# Altium PCB PCB0814.PcbDoc (part 1 of 2)
Units mm, origin at the board's own origin, x right, y up, seen from the top; angles counter-clockwise.
Board outline 53.24 x 23.14 mm, 2 copper layers (Top Layer, Bottom Layer); 33 components, 51 nets, 167 pads, 151 vias.
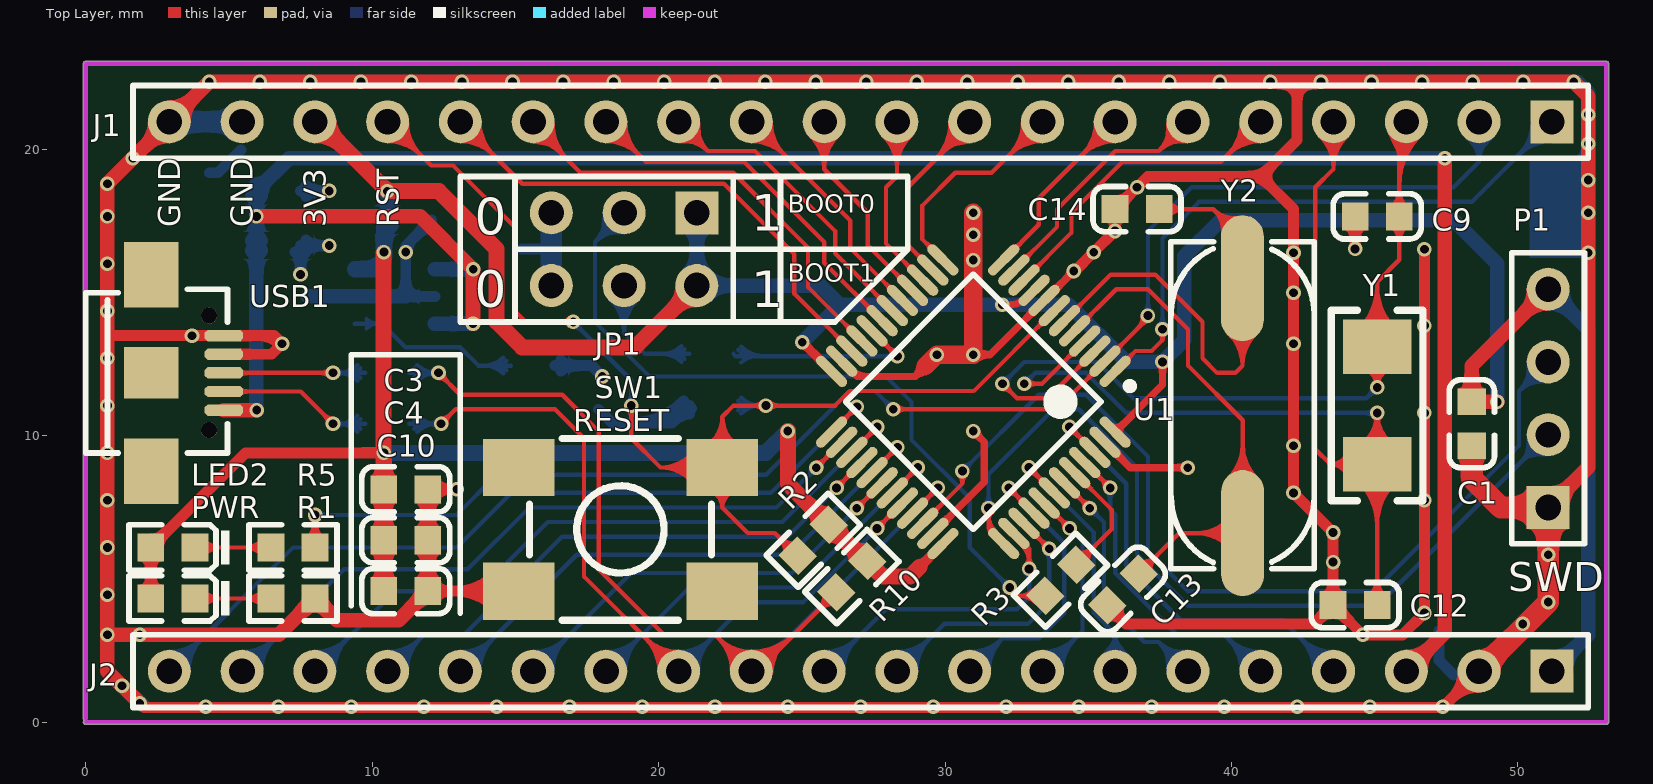
[diagram p0: Top Layer view]
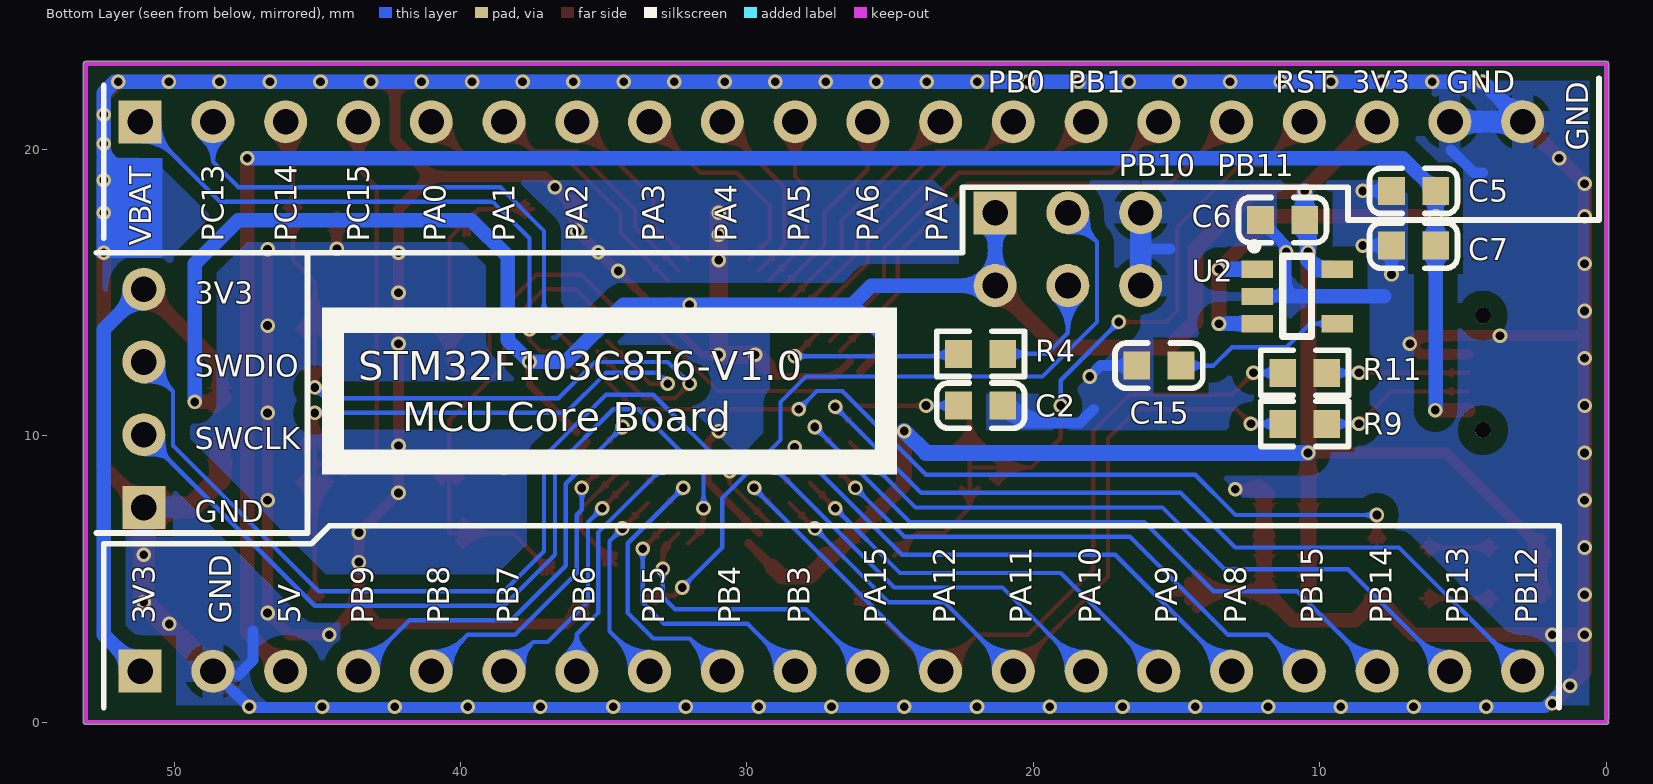
[diagram p1: Bottom Layer view, seen from below]
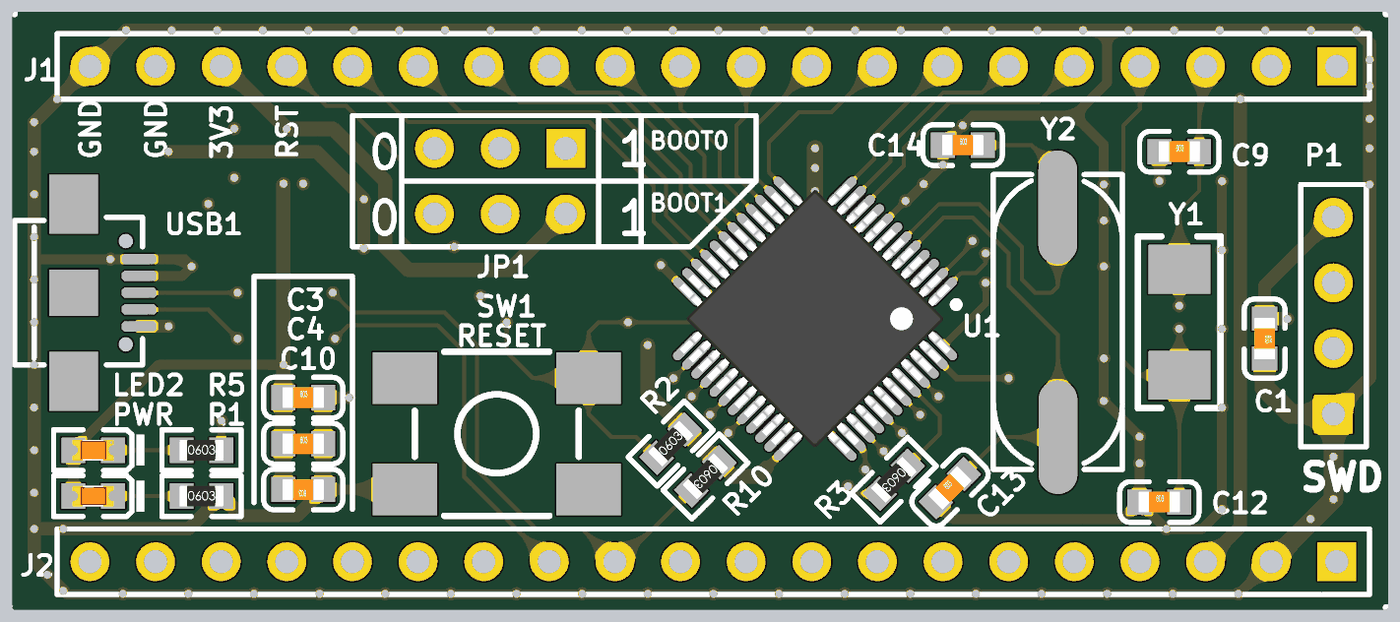
[diagram p3: 3D render of the assembled board from above, using the file's embedded part models]
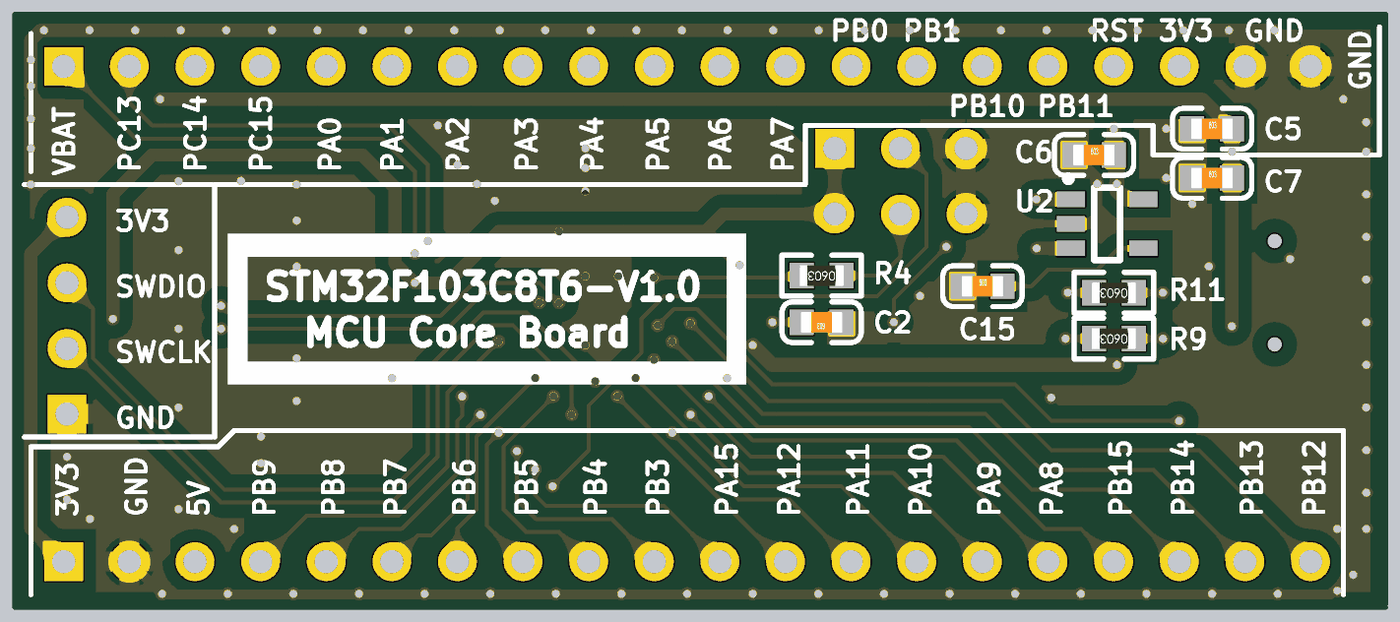
[diagram p4: 3D render of the assembled board from below, using the file's embedded part models]

## Layer stack, top to bottom
Top Solder: solder mask 0.0102, Solder Resist, Dk 3.5
Top Layer: signal copper 0.0356
Dielectric1: dielectric 0.32, FR-4, Dk 4.8
Bottom Layer: signal copper 0.0356
Bottom Solder: solder mask 0.0102, Solder Resist, Dk 3.5

## Board outline
-0.043,0.064 cw(c0,0.127) -0.077,0.127 -0.077,22.987 cw(c0,22.987) 0,23.064 53.086,23.064 cw(c53.086,22.987) 53.163,22.987 53.163,0 cw(c53.086,0) 53.086,-0.077 0,-0.077 cw(c0,0)

## Design rules (kind name [scope] priority, off if disabled: settings)
Clearance Clearance_3 [InComponent('USB1')] p1: gap=0.127 ignorepadtopadclearanceinfootprint=FALSE
Clearance Clearance_2 [InComponent(U1) and IsPad] p2: gap=0.127 ignorepadtopadclearanceinfootprint=FALSE except(0: Arc-Hole Track-Hole SMDPad-Hole THPad-Hole Via-Hole Fill-Hole Poly-Hole Region-Hole Text-Hole)
Clearance Clearance_1 [InPolygon] p3: gap=0.508 ignorepadtopadclearanceinfootprint=FALSE except(0: Arc-Hole Track-Hole SMDPad-Hole THPad-Hole Via-Hole Fill-Hole Poly-Hole Region-Hole Text-Hole)
Clearance [All] p4: gap=0.152 ignorepadtopadclearanceinfootprint=FALSE except(0: Arc-Hole Track-Hole SMDPad-Hole THPad-Hole Via-Hole Fill-Hole Poly-Hole Region-Hole Text-Hole)
PolygonConnect PolygonConnect_2 [IsSMTPin] p1: connectstyle=Direct reliefconductorwidth=0.254 reliefentries=4 polygonreliefangle="90 Angle" airgapwidth=0.254
PolygonConnect PolygonConnect_1 [isvia] p2: connectstyle=Direct reliefconductorwidth=0.254 reliefentries=4 polygonreliefangle="90 Angle" airgapwidth=0.254
PolygonConnect [All] p3: connectstyle=Relief reliefconductorwidth=0.762 reliefentries=4 polygonreliefangle="90 Angle" airgapwidth=0.254
RoutingVias [All] p1: holewidth=0.305 width=0.559 viastyle="Through Hole" minholewidth=0.305 minwidth=0.508 maxholewidth=0.305 maxwidth=0.559
SolderMaskExpansion [All] p1: expansion=0.064
Width Width_1 [InNetClass('POWER')] p1: maxlimit=1.016 minlimit=0.152 preferedwidth=0.254
Width [All] p2: maxlimit=0.152 minlimit=0.152 preferedwidth=0.152
30 further rules are at their usual default settings.

## Classes and differential pairs
component class PCB0814: C1 C2 C3 C4 C5 C6 C7 C9 C10 C12 C13 C14 C15 JP1 LED2 P1 PWR R1 R2 R3 R4 R5 R9 R10 R11 SW1 U2 USB1 Y1
net class POWER: +5 GND VCC3V3 VCC3V5

## Components (designator, comment, footprint, x,y, rotation, side; value= is the part's Value field where it differs from the comment)
C1 "104" 0603_C 48.387,10.414 r270 top locked
C2 "104" 0603_C 21.844,11.049 r0 bottom locked
C3 "104" 0603_C 11.176,8.128 r0 top locked
C4 "104" 0603_C 11.176,6.349 r0 top locked
C5 "105" 0603_C 6.731,18.542 r180 bottom locked
C6 "105" 0603_C 11.303,17.526 r180 bottom locked
C7 "104" 0603_C 6.731,16.637 r180 bottom locked
C9 "20P" 0603_C 45.085,17.653 r0 top locked
C10 "104" 0603_C 11.176,4.572 r180 top locked
C12 "20P" 0603_C 44.315,4.087 r0 top locked
C13 "20P" 0603_C 36.21,4.631 r45 top locked
C14 "20P" 0603_C 36.703,17.907 r0 top locked
C15 "223" 0603_C 15.621,12.446 r180 bottom locked
J1 "CON20" HDR1X20 51.181,20.955 r180 top locked
J2 "CON20" HDR1X20 51.181,1.778 r180 top locked
JP1 "HEADER 3X2" HDR2X3 21.336,17.78 r180 top locked
LED2 "绿灯 0603" 0603_LED_S1 3.048,6.096 r180 top locked
P1 "Header 4" HDR4X1_A 51.054,7.493 r90 top locked
PWR "红灯 0603" 0603_LED_S1 3.048,4.318 r180 top locked
R1 "680R" 0603_R 7.239,4.318 r0 top locked
R2 "10K" 0603_R 25.4,6.35 r45 top locked
R3 "100K" 0603_R 34.036,4.953 r225 top locked
R4 "100K" 0603_R 21.844,12.854 r0 bottom locked
R5 "680R" 0603_R 7.239,6.096 r0 top locked
R9 "22R" 0603_R 10.533,10.414 r0 bottom locked
R10 "10KΩ" 0603_R 26.745,5.08 r225 top locked
R11 "22R" 0603_R 10.533,12.192 r0 bottom locked
SW1 "SW-PB4" SW_PB4_A1 18.669,6.731 r180 top locked
U1 "STM32F103C8T6" LQFP-48 30.988,11.184 r225 top locked
U2 "ME6211-3.3" SOT-23-5 10.795,14.859 r0 bottom locked
USB1 "USB_Mrico" USB_MICRO 2.286,12.192 r270 top locked (schematic designator M1)
Y1 "32.768KHz" SMD-5032_2P 45.085,11.049 r90 top locked
Y2 "XTAL" X-SM49 40.386,11.049 r90 top locked

## Footprints (in the part's own frame and the unit in brackets; to place one, negate y for a bottom-side part, rotate by r counter-clockwise, add the part's x,y. Pads: shape width x height; smd on the part's side, far side on the other; paste and mask are expansions set on the pad)
0603_C [mm]
  rect 0.93x0.98 smd: 1(-0.77,0) 2(0.77,0)
  silkscreen extent -1.54,-0.79 1.54,0.79, body extent -0.8,-0.4 0.8,0.4, height 0.3
0603_LED_S1 [mm]
  rect 0.93x0.98 smd: A(0.77,0) K(-0.77,0)
  silkscreen extent -1.98,-0.79 1.54,0.79, body extent -0.8,-0.4 0.8,0.4, height 0.6
0603_R [mm]
  rect 0.93x0.98 smd: 1(-0.77,0) 2(0.77,0)
  silkscreen extent -1.53,-0.79 1.54,0.79, body extent -0.85,-0.4 0.85,0.4, height 0.56
HDR1X20 [mm] "Connector; Header; 20 Position"
  rect 1.5x1.5 hole 0.9: 1(0,0)
  round 1.5 hole 0.9: 2(2.54,0) 3(5.08,0) 4(7.62,0) 5(10.16,0) 6(12.7,0) 7(15.24,0) 8(17.78,0) 9(20.32,0) 10(22.86,0) 11(25.4,0) 12(27.94,0) 13(30.48,0) 14(33.02,0) 15(35.56,0) 16(38.1,0) 17(40.64,0) 18(43.18,0) 19(45.72,0) 20(48.26,0)
  silkscreen extent -1.27,-1.27 49.53,1.27
HDR2X3 [mm] "Connector; Header; 3x2 Position"
  rect 1.5x1.5 hole 0.9: 1(0,0)
  round 1.5 hole 0.9: 2(0,2.54) 3(2.54,0) 4(2.54,2.54) 5(5.08,0) 6(5.08,2.54)
  silkscreen extent -1.27,-1.27 6.35,3.81
HDR4X1_A [mm] "Connector; Header; 4 Position"
  rect 1.5x1.5 hole 0.9: 1(0,0)
  round 1.5 hole 0.9: 2(2.54,0) 3(5.08,0) 4(7.62,0)
  silkscreen extent -1.27,-1.27 8.89,1.27
LQFP-48 [mm] "LQFP, 48-Leads, Body 7.10x7.10mm, Pitch 0.50mm, IPC Medium Density"
  oval 1.4x0.35 smd: 1(-4.25,2.75) 2(-4.25,2.25) 3(-4.25,1.75) 4(-4.25,1.25) 5(-4.25,0.75) 6(-4.25,0.25) 7(-4.25,-0.25) 8(-4.25,-0.75) 9(-4.25,-1.25) 10(-4.25,-1.75) 11(-4.25,-2.25) 12(-4.25,-2.75) 25(4.25,-2.75) 26(4.25,-2.25) 27(4.25,-1.75) 28(4.25,-1.25) 29(4.25,-0.75) 30(4.25,-0.25) 31(4.25,0.25) 32(4.25,0.75) 33(4.25,1.25) 34(4.25,1.75) 35(4.25,2.25) 36(4.25,2.75)
  oval 0.35x1.4 smd: 13(-2.75,-4.25) 14(-2.25,-4.25) 15(-1.75,-4.25) 16(-1.25,-4.25) 17(-0.75,-4.25) 18(-0.25,-4.25) 19(0.25,-4.25) 20(0.75,-4.25) 21(1.25,-4.25) 22(1.75,-4.25) 23(2.25,-4.25) 24(2.75,-4.25) 37(2.75,4.25) 38(2.25,4.25) 39(1.75,4.25) 40(1.25,4.25) 41(0.75,4.25) 42(0.25,4.25) 43(-0.25,4.25) 44(-0.75,4.25) 45(-1.25,4.25) 46(-1.75,4.25) 47(-2.25,4.25) 48(-2.75,4.25)
  silkscreen extent -4.37,-3.15 3.15,3.6, body extent -7.42,-7.42 7.42,7.42, height 1.6
SMD-5032_2P [mm]
  rect 1.9x2.4 smd: 1(-2.05,0) 2(2.05,0)
  silkscreen extent -3.33,-1.6 3.33,1.6
SOT-23-5 [mm]
  rect 1.1x0.6 smd: 1(1.4,-0.95) 2(1.4,0) 3(1.4,0.95) 4(-1.4,0.95) 5(-1.4,-0.95)
  silkscreen extent -0.5,-1.87 1.63,1.4
SW_PB4_A1 [mm]
  rect 2.5x2 smd: 1(-3.556,2.159) 2(-3.556,-2.159) 3(3.556,-2.159) 4(3.556,2.159)
  silkscreen extent -3.17,-3.18 3.17,3.18, body extent -3.18,-3.18 3.18,3.18, height 6
USB_MICRO [mm] "USB方孔"
  oct 0.4x1.35 smd: 1(-1.3,2.54) 2(-0.65,2.54) 3(0,2.54) 4(0.65,2.54) 5(1.3,2.54)
  rect 2.286x1.9 smd: 6(3.429,0) 7(-3.429,0)
  rect 1.8x1.9 smd: 8(0,0)
  silkscreen extent -2.92,-2.29 2.79,2.67
X-SM49 [mm]
  oval 4.4x1.5 smd: 1(4.45,0.004) 2(-4.45,-0.004)
  silkscreen extent -5.7,-2.5 5.72,2.5

## Part data
C1 C2 C5 C6 C7 C10 C15: library part "0603 1uF (105) 10% 50V", "贴片电容"
C3 C4 C9 C12 C13 C14: library part "0603 68pF (680) 5% 50V", "贴片电容"
J1 J2: "Connector"
LED2: library part "0603 绿灯", "发光二极管"
P1: "接插件"
PWR: library part "0603 红灯", "发光二极管"
R1 R2 R3 R4 R5: library part "0603 1KΩ (1001) 1%", "贴片电阻"
R9 R11: library part "0603 22Ω (22R0) 1%", "贴片电阻"
R10: library part "0603 2KΩ (2001) 1%", "贴片电阻"
SW1: "微动开关"
USB1: library part USB_M, "MicroUSB接口"
Y1: library part "SMD-5032_2P 11.0592MHZ 20PF 20PPM", "贴片晶振"
Y2: "晶振"

## Free pads (board coordinates)
  round 0.56 hole 0.56 unplated: 0(4.309,10.192) 0(4.309,14.192)

## Via types
v1: diameter 0.508, hole 0.305, Top Layer to Bottom Layer, tented both sides, 151 vias

## Nets (pads, with @x,y where several pads share a name; then routed paths per layer and width w, separated by ;. In a path a pad name is that pad's centre, name@x,y a point inside that pad or via, vN(x,y) a via of type N, cw(c..) or ccw(c..) an arc to the next point about the centre after c; other vN are vias at no path point)
+5: C5.2 C7.2 J2.3 U2.1 U2.3 USB1.5 | length 87.2
  Top Layer w0.508: USB1.5@4.826,10.892 v1(5.969,10.892) ; v1(5.961,17.653) 11.684,17.653 13.523,15.814 13.523,15.809 v1(13.523,13.909) ; J2.3@46.101,1.778 47.447,3.124 v1(47.447,19.685) ; J2.3@46.101,2.274 ccw(c46.101,3.471) 46.948,2.625 ccw(c47.794,1.778) J2.3@46.597,1.778
  Bottom Layer w0.508: C7.2@5.812,16.463 cw(c5.452,16.103) 5.961,16.103 cw(c6.47,16.103) C7.2@6.11,16.463 ; C7.2@5.812,16.811 ccw(c5.452,17.171) 5.961,17.171 ccw(c6.47,17.171) C7.2@6.11,16.811 ; C5.2@5.812,18.368 cw(c5.452,18.008) 5.961,18.008 cw(c6.47,18.008) C5.2@6.11,18.368 ; C5.2@5.961,18.778 ccw(c5.961,19.348) C5.2@6.364,18.945 ; v1(5.969,10.892) 5.961,10.9 C7.2@5.961,16.637 v1(5.961,17.653) C5.2@5.961,18.542 7.104,19.685 v1(47.447,19.685) ; C5.2@6.172,18.567 cw(c6.621,18.567) C5.2@6.304,18.885 ; U2.3@12.195,13.909 v1(13.523,13.909) ; U2.1@12.195,15.809 v1(13.528,15.809)
BOOT0: R3.1 U1.44 | length 7
  Top Layer w0.152: U1.44@34.524,8.709 35.814,7.419 35.814,6.731 R3.1@34.58,5.497 ; R3.1@34.58,5.734 ccw(c34.58,6.305) 34.984,5.901 ccw(c35.388,5.497) R3.1@34.817,5.497 ; R3.1@34.58,5.886 ccw(c34.58,6.825) 35.244,6.161 ccw(c35.908,5.497) R3.1@34.969,5.497 ; U1.44@34.895,8.239 cw(c34.895,8.001) 35.063,8.169 cw(c35.232,8.338) U1.44@34.994,8.338
BOOT1: R4.2 U1.20 | length 10.8
  Top Layer w0.152: U1.20@27.452,13.659 v1(28.338,12.773) ; U1.20@27.824,13.189 cw(c27.824,12.95) 27.992,13.119 cw(c28.161,13.288) U1.20@27.923,13.288 ; v1@28.16,12.773 ccw(c27.731,12.773) 28.035,13.077 ccw(c28.338,13.38) v1@28.338,12.951
  Bottom Layer w0.152: R4.2@22.614,12.854 22.695,12.773 v1(28.338,12.773) ; R4.2@22.781,12.996 ccw(c23.32,13.535) 23.32,12.773 ; R4.2@22.889,12.554 cw(c23.418,12.025) 23.418,12.773 ; R4.2@22.889,13.104 ccw(c23.688,13.902) 23.688,12.773 ; v1@28.212,12.647 ccw(c27.909,12.344) 27.909,12.773 ccw(c27.909,13.202) v1@28.212,12.899
GND: C1.2 C2.1 C3.2 C4.2 C5.1 C6.1 C7.1 C9.1 C10.1 C12.1 C13.1 C14.1 C15.1 J1.19 J1.20 J2.2 JP1.5 JP1.6 P1.1 R1.2 SW1.4 U1.8 U1.23 U1.35 U1.47 U2.2 USB1.1 USB1.2 | length 434.5
  Top Layer w0.254: U1.23@26.392,12.598 26.925,12.065 28.956,12.065 29.32,12.429 ; U1.23@26.797,12.261 ccw(c27.27,12.734) 27.27,12.065 ; U1.35@29.574,6.588 31.369,8.383 31.369,9.779 v1(30.988,10.16) ; v1@30.988,10.033 cw(c30.988,9.726) 31.205,9.943 cw(c31.422,10.16) v1@31.115,10.16 ; v1(30.988,12.827) 31.57,12.827 U1.8@33.463,14.72 v1(34.491,15.748) ; v1@31.078,12.737 cw(c31.295,12.52) 31.295,12.827 cw(c31.295,13.134) v1@31.078,12.917 ; v1@34.364,15.748 cw(c34.058,15.748) 34.275,15.531 cw(c34.491,15.314) v1@34.491,15.621 ; U1.47@35.584,9.77 36.47,8.884 v1(38.475,8.884) ; v1@38.385,8.794 ccw(c38.168,8.577) 38.168,8.884 ccw(c38.168,9.191) v1@38.385,8.974
  Top Layer w0.381: 0.762,13.492 v1(3.713,13.492) USB1.1@4.826,13.492 6.574,13.492 v1(6.858,13.208) 6.492,12.842 USB1.2@4.826,12.842 5.73,12.842 ; v1@1.778,0.762 2.032,0.508 47.371,0.508 J2.2@48.641,1.778 ; 6.019,13.492 cw(c6.019,12.369) v1@6.813,13.163 ; C10.1@11.946,4.572 SW1.4@15.113,4.572 ; C3.2@11.946,8.128 v1(12.954,8.128) ; C10.1@12.14,4.378 cw(c12.609,3.909) 12.609,4.572 cw(c12.609,5.235) C10.1@12.14,4.766 ; C3.2@12.14,7.934 cw(c12.609,7.465) 12.609,8.128 cw(c12.609,8.791) C3.2@12.14,8.322 ; SW1.4@14.291,4 ccw(c12.909,2.618) 12.909,4.572 ccw(c12.909,6.526) SW1.4@14.291,5.144 ; SW1.4@14.56,4.269 ccw(c13.829,3.538) 13.829,4.572 ccw(c13.829,5.606) SW1.4@14.56,4.875 ; v1(34.491,15.748) 34.536,15.748 v1(35.189,16.401) v1(35.933,17.145) C14.1@35.933,17.907 37.076,19.05 41.021,19.05 ; C13.1@35.666,4.087 36.323,3.429 42.888,3.429 C12.1@43.545,4.087 ; C13.1@35.684,3.794 cw(c35.684,3.132) 36.152,3.6 cw(c36.621,4.069) C13.1@35.958,4.069 ; C14.1@35.739,17.688 cw(c35.27,17.219) 35.933,17.219 cw(c36.596,17.219) C14.1@36.127,17.688 ; C14.1@35.933,18.206 ccw(c35.933,18.93) 36.444,18.418 ; C14.1@36.208,17.932 cw(c36.81,17.932) C14.1@36.384,18.358 ; 42.291,22.352 42.291,20.32 41.021,19.05 ; 43.034,3.575 cw(c43.545,3.064) 43.545,3.787 cw(c43.545,3.064) 44.056,3.575 ; C12.1@43.094,3.636 ccw(c42.668,4.062) C12.1@43.271,4.062 ; C12.1@43.351,4.306 ccw(c42.882,4.774) 43.545,4.774 ccw(c44.208,4.774) C12.1@43.739,4.306 ; C12.1@43.82,4.062 ccw(c44.422,4.062) C12.1@43.996,3.636 ; C9.1@44.121,17.434 cw(c43.652,16.965) 44.315,16.965 cw(c44.978,16.965) C9.1@44.509,17.434 ; v1(44.315,16.518) C9.1@44.315,17.653 ; v1(46.736,16.51) v1(46.736,3.81) 45.974,3.048 v1(44.584,3.048) C12.1@43.545,4.087 ; J2.2@48.082,1.778 cw(c46.731,1.778) 47.686,0.823 cw(c48.641,-0.132) J2.2@48.641,1.219 ; 41.021,19.05 42.164,17.907 v1(42.164,16.383) v1(42.164,14.986) v1(42.164,13.208) v1(42.164,9.652) v1(42.164,8.001) v1(43.545,6.62) v1(43.545,5.588) C12.1@43.545,4.087
  Top Layer w0.508: v1(0.762,3.048) 6.739,3.048 R1.2@8.009,4.318 8.771,3.556 10.93,3.556 C10.1@11.946,4.572 C4.2@11.946,6.349 C3.2@11.946,8.128 ; v1(0.762,14.351) v1(0.762,12.7) ; v1@1.778,0.762 0.762,1.778 v1(0.762,4.445) v1(0.762,6.096) v1(0.762,7.747) v1(0.762,9.398) v1(0.762,11.049) v1(0.762,12.7) ; J1.20@2.425,20.955 cw(c1.228,20.955) 2.074,20.108 cw(c2.921,19.262) J1.20@2.921,20.459 ; J1.20@2.921,21.451 ccw(c2.921,22.648) 3.768,21.802 ccw(c4.614,20.955) J1.20@3.417,20.955 ; R1.2@7.606,3.915 cw(c8.009,3.512) 8.009,4.082 cw(c8.009,3.512) R1.2@8.412,3.915 ; R1.2@7.667,3.975 ccw(c7.349,4.293) R1.2@7.798,4.293 ; R1.2@8.22,4.293 ccw(c8.669,4.293) R1.2@8.352,3.975 ; C10.1@11.543,4.169 cw(c11.946,3.766) C10.1@11.946,4.336 ; C10.1@11.603,4.229 ccw(c11.286,4.547) C10.1@11.735,4.547 ; C10.1@11.797,4.746 ccw(c11.437,5.106) 11.946,5.106 ccw(c12.455,5.106) C10.1@12.095,4.746 ; C4.2@11.797,6.175 cw(c11.437,5.815) 11.946,5.815 cw(c12.455,5.815) C4.2@12.095,6.175 ; C4.2@11.797,6.523 ccw(c11.437,6.883) 11.946,6.883 ccw(c12.455,6.883) C4.2@12.095,6.523 ; C3.2@11.797,7.954 cw(c11.437,7.594) 11.946,7.594 cw(c12.455,7.594) C3.2@12.095,7.954 ; P1.1@51.054,7.493 52.451,8.89 v1(52.451,20.193) v1(52.451,21.209) 52.451,21.844 v1(51.943,22.352) v1(50.179,22.352) v1(48.415,22.352) v1(46.651,22.352) v1(44.887,22.352) v1(43.124,22.352) 42.291,22.352 v1(41.36,22.352) v1(39.596,22.352) v1(37.832,22.352) v1(36.068,22.352) v1(34.304,22.352) v1(32.54,22.352) v1(30.776,22.352) v1(29.012,22.352) v1(27.249,22.352) v1(25.485,22.352) v1(23.721,22.352) v1(21.957,22.352) v1(20.193,22.352) v1(18.429,22.352) v1(16.665,22.352) v1(14.901,22.352) v1(13.137,22.352) v1(11.374,22.352) v1(9.61,22.352) v1(7.846,22.352) v1(6.082,22.352) v1(4.318,22.352) J1.20@2.921,20.955 v1(0.762,18.796) v1(0.762,17.653) v1(0.762,16.002) v1(0.762,12.7) ; P1.1@51.054,7.989 ccw(c51.054,9.186) 51.901,8.34 ccw(c52.747,7.493) P1.1@51.55,7.493
  Top Layer w0.635: 29.32,12.429 v1(29.718,12.827) v1(30.988,12.827) v1(30.988,17.78)
  Top Layer w0.762: C1.2@48.387,9.644 48.387,8.509 49.403,7.493 P1.1@51.054,7.493 v1(51.054,4.191) J2.2@48.641,1.778 ; J2.2@48.641,2.147 ccw(c48.641,3.038) 49.271,2.408 ccw(c49.901,1.778) J2.2@49.01,1.778 ; P1.1@50.793,7.754 cw(c50.163,8.384) 50.163,7.493 cw(c50.163,6.602) 50.793,7.232 cw(c50.163,6.602) 51.054,6.602 cw(c51.945,6.602) P1.1@51.315,7.232
  Bottom Layer w0.381: 1.778,0.889 2.159,0.508 47.371,0.508 J2.2@48.641,1.778 ; 4.318,19.177 4.625,19.177 5.424,19.976 ; C7.1@7.307,16.418 cw(c6.838,15.949) 7.501,15.949 cw(c8.164,15.949) C7.1@7.695,16.418 ; v1(7.501,15.629) C7.1@7.501,16.637 v1(8.509,16.637) ; C5.1@7.501,18.542 v1(8.509,18.542) ; C7.1@7.695,16.443 cw(c8.164,15.974) 8.164,16.637 cw(c8.164,17.3) C7.1@7.695,16.831 ; C5.1@7.695,18.348 cw(c8.164,17.879) 8.164,18.542 cw(c8.164,19.205) C5.1@7.695,18.736 ; v1(11.176,16.409) 11.176,14.859 U2.2@12.195,14.859 ; v1@11.176,16.629 C6.1@12.073,17.526 ; v1@11.239,16.409 cw(c11.924,16.409) 11.44,16.893 ; 11.562,17.015 cw(c12.073,16.503) C6.1@12.073,17.227 ; C6.1@11.622,17.075 ccw(c11.196,17.501) C6.1@11.799,17.501 ; 15.24,16.51 16.255,16.51 16.256,16.511 ; C15.1@16.391,12.446 17.653,12.446 v1(18.034,12.065) ; C15.1@16.585,12.252 cw(c17.054,11.783) 17.054,12.446 cw(c17.054,13.109) C15.1@16.585,12.64 ; 17.907,10.922 18.383,10.446 20.471,10.446 C2.1@21.074,11.049 ; 19.016,10.446 ccw(c19.016,13.082) C2.1@20.88,11.218 ; 19.936,10.446 ccw(c19.936,12.162) C2.1@21.149,10.949 ; 20.563,10.538 cw(c21.074,10.026) C2.1@21.074,10.75 ; C2.1@20.623,10.598 ccw(c20.197,11.024) C2.1@20.8,11.024 ; 47.244,3.175 47.244,2.159 47.752,1.651
  Bottom Layer w0.508: J1.20@2.921,20.955 v1(4.318,22.352) ; J1.20@2.921,21.451 ccw(c2.921,22.648) 3.768,21.802 ccw(c4.614,20.955) J1.20@3.417,20.955 ; v1(6.082,22.352) v1(4.318,22.352) ; 7.747,14.859 11.176,14.859 ; v1(27.249,22.352) v1(29.012,22.352) ; v1(43.124,22.352) v1(41.36,22.352) ; 52.07,19.431 52.451,19.812 v1(52.451,20.193) ; 52.261,19.622 ccw(c51.784,20.098) v1(52.451,20.193) ; v1(4.318,22.352) v1(7.846,22.352) v1(9.61,22.352) v1(11.374,22.352) v1(13.137,22.352) v1(14.901,22.352) v1(16.665,22.352) v1(18.429,22.352) v1(20.193,22.352) v1(21.957,22.352) v1(23.721,22.352) v1(25.485,22.352) v1(29.012,22.352) ; v1(29.012,22.352) v1(30.776,22.352) v1(32.54,22.352) v1(34.304,22.352) v1(36.068,22.352) v1(37.832,22.352) v1(39.596,22.352) v1(41.36,22.352) ; v1(41.36,22.352) v1(44.887,22.352) v1(46.651,22.352) v1(48.415,22.352) v1(50.179,22.352) 52.07,22.352 52.451,21.971 v1(52.451,21.209) v1(52.451,20.193)
  Bottom Layer w0.762: J1.20@2.921,20.955 J1.19@5.461,20.955 ; J1.20@3.182,20.694 cw(c3.812,20.064) 3.812,20.955 cw(c3.812,21.846) J1.20@3.182,21.216 ; J1.19@5.2,20.694 ccw(c4.57,20.064) 4.57,20.955 ccw(c4.57,21.846) J1.19@5.2,21.216 ; JP1.6@16.256,15.24 16.256,16.511 JP1.5@16.256,17.78
  other v1: 4.191,0.533 6.731,0.533 9.271,0.533 11.811,0.533 14.351,0.533 16.891,0.533 19.431,0.533 21.971,0.533 24.511,0.533 27.051,0.533 29.591,0.533 32.131,0.533 34.671,0.533 37.211,0.533 39.751,0.533 42.291,0.533 44.831,0.533 47.371,0.533 1.887,0.653 1.27,1.27 1.887,3.048 50.165,3.429 51.054,5.842 46.736,7.747 46.736,10.795 46.736,13.843 30.988,16.129 52.451,16.383 30.988,17.018 52.451,17.78 36.703,18.669 52.451,18.923 1.651,19.685
NetC15_2: C15.2 U2.4 | length 9.3
  Bottom Layer w0.152: U2.4@9.395,13.909 10.348,13.909 11.176,13.081 13.081,13.081 13.716,12.446 C15.2@14.851,12.446 ; U2.4@9.803,13.751 cw(c10.185,13.369) 10.185,13.909 cw(c10.185,14.449) U2.4@9.803,14.067 ; C15.2@14.576,12.171 ccw(c13.912,11.507) 13.912,12.446 ccw(c13.912,13.385) C15.2@14.576,12.721 ; C15.2@14.684,12.279 ccw(c14.28,11.875) 14.28,12.446 ccw(c14.28,13.017) C15.2@14.684,12.613
NetJP1_3: JP1.3 R3.2 | length 35.5
  Top Layer w0.152: v1(32.258,4.699) 32.548,4.409 ; v1@32.264,4.521 cw(c32.276,4.136) 32.548,4.409 ; v1@32.436,4.693 ccw(c32.821,4.681) 32.548,4.409 ; 32.578,4.409 cw(c32.578,3.53) R3.2@33.199,4.151 ; R3.2@32.946,4.409 cw(c32.946,3.898) R3.2@33.307,4.259 ; R3.2@33.187,4.689 cw(c32.549,5.276) 32.549,4.409 ; R3.2@33.492,4.409 32.548,4.409 ; R3.2@32.895,4.409 ccw(c32.895,4.957) R3.2@33.3,4.586 ; R3.2@32.895,4.409 ccw(c32.895,4.957) R3.2@33.3,4.586 ; R3.2@32.895,4.409 ccw(c32.895,4.957) R3.2@33.3,4.586 ; R3.2@32.895,4.409 ccw(c32.895,4.957) R3.2@33.3,4.586
  Bottom Layer w0.152: JP1.3@18.125,17.718 cw(c16.935,17.609) 17.78,16.764 ; JP1.3@18.277,17.732 cw(c17.356,17.648) 18.01,16.994 cw(c18.664,16.34) JP1.3@18.748,17.261 ; JP1.3@18.429,17.746 cw(c17.777,17.686) 18.24,17.224 cw(c18.702,16.761) JP1.3@18.762,17.413 ; JP1.3@18.734,17.109 ccw(c18.625,15.919) 17.78,16.764 ; JP1.3@18.796,17.78 17.78,16.764 ; v1@32.08,4.699 ccw(c31.651,4.699) 31.954,5.003 ccw(c32.258,5.306) v1@32.258,4.877 ; v1(32.258,4.699) 30.861,6.096 30.861,7.82 28.829,9.852 28.829,11.176 27.94,12.065 19.685,12.065 17.78,13.97 17.78,16.764
NetJP1_4: JP1.4 R4.1 | length 12.5
  Bottom Layer w0.152: JP1.4@18.32,14.764 cw(c17.169,13.613) 18.796,13.613 cw(c20.423,13.613) JP1.4@19.272,14.764 ; JP1.4@18.427,14.871 cw(c17.537,13.981) 18.796,13.981 cw(c20.055,13.981) JP1.4@19.165,14.871 ; JP1.4@18.535,14.979 cw(c17.905,14.349) 18.796,14.349 cw(c19.687,14.349) JP1.4@19.057,14.979 ; JP1.4@18.796,15.24 18.796,13.589 19.531,12.854 R4.1@21.074,12.854 ; R4.1@20.799,12.579 ccw(c20.135,11.915) 20.135,12.854 ccw(c20.135,13.793) R4.1@20.799,13.129 ; R4.1@20.907,12.687 ccw(c20.503,12.283) 20.503,12.854 ccw(c20.503,13.425) R4.1@20.907,13.021
NetLED2_K: LED2.K R5.1 | length 7.4
  Top Layer w0.152: LED2.K@3.818,6.096 R5.1@6.469,6.096 ; LED2.K@3.985,5.929 cw(c4.389,5.525) 4.389,6.096 cw(c4.389,6.667) LED2.K@3.985,6.263 ; LED2.K@4.093,5.821 cw(c4.757,5.157) 4.757,6.096 cw(c4.757,7.035) LED2.K@4.093,6.371 ; R5.1@6.194,5.821 ccw(c5.53,5.157) 5.53,6.096 ccw(c5.53,7.035) R5.1@6.194,6.371 ; R5.1@6.302,5.929 ccw(c5.898,5.525) 5.898,6.096 ccw(c5.898,6.667) R5.1@6.302,6.263
NetM1_3: R11.1 USB1.3 | length 9.1
  Top Layer w0.152: USB1.3@4.826,12.192 v1(8.636,12.192) ; USB1.3@5.389,12.104 cw(c5.6,11.893) 5.6,12.192 cw(c5.6,12.491) USB1.3@5.389,12.28 ; v1@8.51,12.066 ccw(c8.207,11.763) 8.207,12.192 ccw(c8.207,12.621) v1@8.51,12.318
  Bottom Layer w0.152: v1(8.636,12.192) R11.1@9.763,12.192 ; v1@8.762,12.066 cw(c9.065,11.763) 9.065,12.192 cw(c9.065,12.621) v1@8.762,12.318 ; R11.1@9.488,11.917 ccw(c8.824,11.253) 8.824,12.192 ccw(c8.824,13.131) R11.1@9.488,12.467 ; R11.1@9.596,12.025 ccw(c9.192,11.621) 9.192,12.192 ccw(c9.192,12.763) R11.1@9.596,12.359
NetM1_4: R9.1 USB1.4 | length 9.6
  Top Layer w0.152: USB1.4@4.826,11.542 7.508,11.542 v1(8.636,10.414) ; USB1.4@5.389,11.454 cw(c5.6,11.243) 5.6,11.542 cw(c5.6,11.841) USB1.4@5.389,11.63 ; v1@8.458,10.414 ccw(c8.029,10.414) 8.332,10.718 ccw(c8.636,11.021) v1@8.636,10.592
  Bottom Layer w0.152: v1(8.636,10.414) R9.1@9.763,10.414 ; v1@8.762,10.288 cw(c9.065,9.985) 9.065,10.414 cw(c9.065,10.843) v1@8.762,10.54 ; R9.1@9.488,10.139 ccw(c8.824,9.475) 8.824,10.414 ccw(c8.824,11.353) R9.1@9.488,10.689 ; R9.1@9.596,10.247 ccw(c9.192,9.843) 9.192,10.414 ccw(c9.192,10.985) R9.1@9.596,10.581
NetPWR_K: PWR.K R1.1 | length 7.4
  Top Layer w0.152: PWR.K@3.818,4.318 R1.1@6.469,4.318 ; PWR.K@3.985,4.151 cw(c4.389,3.747) 4.389,4.318 cw(c4.389,4.889) PWR.K@3.985,4.485 ; PWR.K@4.093,4.043 cw(c4.757,3.379) 4.757,4.318 cw(c4.757,5.257) PWR.K@4.093,4.593 ; R1.1@6.194,4.043 ccw(c5.53,3.379) 5.53,4.318 ccw(c5.53,5.257) R1.1@6.194,4.593 ; R1.1@6.302,4.151 ccw(c5.898,3.747) 5.898,4.318 ccw(c5.898,4.889) R1.1@6.302,4.485
NRST: C2.2 J1.17 R2.1 SW1.2 U1.7 | length 71.4
  Top Layer w0.152: J1.17@10.541,20.281 cw(c10.541,18.655) 11.691,19.805 cw(c12.841,20.955) J1.17@11.215,20.955 ; J1.17@10.541,20.434 cw(c10.541,19.175) 11.431,20.065 cw(c12.321,20.955) J1.17@11.062,20.955 ; J1.17@10.541,20.586 cw(c10.541,19.695) 11.171,20.325 cw(c11.801,20.955) J1.17@10.91,20.955 ; J1.17@10.541,20.955 12.065,19.431 12.827,19.431 14.986,17.272 14.986,14.351 15.367,13.97 v1(17.018,13.97) ; v1@16.892,13.844 ccw(c16.589,13.541) 16.589,13.97 ccw(c16.589,14.399) v1@16.892,14.096 ; v1@18.924,10.923 cw(c18.621,10.62) 19.05,10.62 cw(c19.479,10.62) v1@19.176,10.923 ; v1(19.05,11.049) 19.05,9.906 20.066,8.89 ; SW1.2@21.251,8.317 ccw(c20.066,7.38) 20.066,8.89 ; SW1.2@21.251,9.463 cw(c20.066,10.4) 20.066,8.89 ; SW1.2@21.37,8.411 ccw(c20.381,7.629) 20.381,8.89 ccw(c20.381,10.151) SW1.2@21.37,9.369 ; SW1.2@21.49,8.506 ccw(c20.696,7.878) 20.696,8.89 ccw(c20.696,9.902) SW1.2@21.49,9.274 ; SW1.2@21.697,9.648 ccw(c20.991,10.66) 22.225,10.66 ; SW1.2@21.784,9.523 ccw(c21.195,10.368) 22.225,10.368 ccw(c23.255,10.368) SW1.2@22.666,9.523 ; SW1.2@21.863,8.04 cw(c21.631,7.493) 22.225,7.493 ; SW1.2@21.871,9.398 ccw(c21.398,10.076) 22.225,10.076 ccw(c23.052,10.076) SW1.2@22.579,9.398 ; SW1.2@21.923,8.18 cw(c21.729,7.724) 22.225,7.724 cw(c22.721,7.724) SW1.2@22.527,8.18 ; SW1.2@22.587,8.04 ccw(c22.819,7.493) 22.225,7.493 ; SW1.2@22.753,9.648 cw(c23.459,10.66) 22.225,10.66 ; v1@23.623,10.923 ccw(c23.32,10.62) 23.32,11.049 ccw(c23.32,11.478) v1@23.623,11.175 ; v1@23.875,10.923 cw(c24.178,10.62) 24.178,11.049 cw(c24.178,11.478) v1@23.875,11.175 ; R2.1@24.449,5.823 ccw(c23.51,5.823) 24.174,6.487 ccw(c24.838,7.151) R2.1@24.838,6.212 ; R2.1@24.601,5.823 ccw(c24.031,5.823) 24.434,6.227 ccw(c24.838,6.63) R2.1@24.838,6.06 ; R2.1@24.856,5.806 24.057,6.604 23.114,6.604 22.225,7.493 ; U1.7@33.346,13.995 cw(c33.108,13.995) 33.277,13.826 cw(c33.445,13.657) U1.7@33.445,13.896 ; U1.7@33.816,14.366 31.007,11.557 26.67,11.557 26.162,11.049 v1(23.749,11.049) 22.614,11.049 22.225,10.66 ; 20.066,8.89 SW1.2@22.225,8.89 ; 22.225,7.493 SW1.2@22.225,8.89 ; SW1.2@22.225,8.89 22.225,10.66
  Bottom Layer w0.152: v1@17.018,13.792 cw(c17.018,13.363) 17.322,13.666 cw(c17.625,13.97) v1@17.196,13.97 ; v1(17.018,13.97) 19.05,11.938 v1(19.05,11.049) ; v1@18.924,11.175 ccw(c18.621,11.478) 19.05,11.478 ccw(c19.479,11.478) v1@19.176,11.175 ; C2.2@22.614,11.049 v1(23.749,11.049) ; C2.2@22.781,10.882 cw(c23.185,10.478) 23.185,11.049 cw(c23.185,11.62) C2.2@22.781,11.216 ; C2.2@22.889,10.774 cw(c23.553,10.11) 23.553,11.049 cw(c23.553,11.988) C2.2@22.889,11.324 ; v1@23.623,10.923 ccw(c23.32,10.62) 23.32,11.049 ccw(c23.32,11.478) v1@23.623,11.175
OSCIN: C13.2 U1.5 Y2.2 | length 31.9
  Top Layer w0.152: U1.5@34.524,13.659 35.978,15.113 37.084,15.113 38.481,13.716 38.481,12.446 40.39,10.537 Y2.2@40.39,6.599 38.178,6.599 C13.2@36.755,5.175 ; U1.5@34.895,14.129 ccw(c34.895,14.367) 35.063,14.199 ccw(c35.232,14.03) U1.5@34.994,14.03 ; C13.2@36.755,5.412 ccw(c36.755,5.983) 37.158,5.579 ccw(c37.562,5.175) C13.2@36.991,5.175 ; C13.2@36.755,5.564 ccw(c36.755,6.503) 37.419,5.839 ccw(c38.082,5.175) C13.2@37.144,5.175 ; Y2.2@39.914,6.123 ccw(c38.764,4.972) 38.764,6.599 ccw(c38.764,8.226) Y2.2@39.914,7.075 ; Y2.2@39.914,8.525 ccw(c38.764,9.676) 40.39,9.676 ccw(c42.017,9.676) Y2.2@40.867,8.525 ; Y2.2@40.022,6.23 ccw(c39.132,5.34) 39.132,6.599 ccw(c39.132,7.858) Y2.2@40.022,6.968 ; Y2.2@40.022,8.418 ccw(c39.132,9.308) 40.39,9.308 ccw(c41.649,9.308) Y2.2@40.759,8.418 ; Y2.2@40.129,6.338 ccw(c39.499,5.708) 39.499,6.599 ccw(c39.499,7.49) Y2.2@40.129,6.86 ; Y2.2@40.129,8.31 ccw(c39.499,8.94) 40.39,8.94 ccw(c41.281,8.94) Y2.2@40.651,8.31
OSCOUT: C14.2 U1.6 Y2.1 | length 29.4
  Top Layer w0.152: U1.6@34.17,14.012 35.779,15.621 37.343,15.621 38.989,13.975 38.989,12.7 39.497,12.192 40.132,12.192 40.382,12.442 ; U1.6@34.541,14.482 ccw(c34.541,14.721) 34.71,14.552 ccw(c34.879,14.384) U1.6@34.64,14.384 ; C14.2@37.473,17.907 39.366,17.907 40.382,16.891 Y2.1@40.382,15.499 40.382,12.442 ; C14.2@37.64,17.74 cw(c38.044,17.336) 38.044,17.907 cw(c38.044,18.478) C14.2@37.64,18.074 ; C14.2@37.748,17.632 cw(c38.412,16.968) 38.412,17.907 cw(c38.412,18.846) C14.2@37.748,18.182 ; 39.599,17.674 ccw(c40.143,18.218) Y2.1@40.285,17.461 ; 39.625,17.647 cw(c39.046,17.068) Y2.1@39.862,16.995 ; Y2.1@39.711,17.009 ccw(c38.622,17.105) 39.395,17.878 ccw(c40.079,18.562) Y2.1@40.257,17.611 ; 39.803,17.469 ccw(c40.208,17.874) Y2.1@40.314,17.312 ; Y2.1@39.909,13.569 cw(c38.802,12.442) 40.382,12.442 ; Y2.1@40.016,13.677 cw(c39.159,12.805) 40.382,12.805 cw(c41.604,12.805) Y2.1@40.747,13.677 ; Y2.1@40.123,13.786 cw(c39.516,13.169) 40.382,13.169 cw(c41.247,13.169) Y2.1@40.64,13.786 ; Y2.1@40.854,13.569 ccw(c41.962,12.442) 40.382,12.442
PA0: J1.5 U1.10 | length 17.3
  Top Layer w0.152: U1.10@32.756,15.427 34.417,17.088 34.417,17.78 36.195,19.558 39.624,19.558 J1.5@41.021,20.955 ; U1.10@33.127,15.897 ccw(c33.127,16.135) 33.296,15.967 ccw(c33.464,15.798) U1.10@33.226,15.798 ; J1.5@40.347,20.955 cw(c38.721,20.955) 39.871,19.805 cw(c41.021,18.655) J1.5@41.021,20.281 ; J1.5@40.5,20.955 cw(c39.241,20.955) 40.131,20.065 cw(c41.021,19.175) J1.5@41.021,20.434 ; J1.5@40.652,20.955 cw(c39.761,20.955) 40.391,20.325 cw(c41.021,19.695) J1.5@41.021,20.586
PA1: J1.6 U1.11 | length 13.8
  Top Layer w0.152: U1.11@32.402,15.78 33.909,17.287 33.909,17.907 35.941,19.939 37.465,19.939 ; U1.11@32.773,16.25 ccw(c32.773,16.489) 32.942,16.32 ccw(c33.111,16.151) U1.11@32.872,16.151 ; J1.6@37.81,20.893 cw(c36.62,20.784) 37.465,19.939 ; J1.6@37.962,20.907 cw(c37.041,20.823) 37.695,20.169 cw(c38.349,19.515) J1.6@38.433,20.436 ; J1.6@38.114,20.921 cw(c37.462,20.861) 37.925,20.399 cw(c38.387,19.936) J1.6@38.447,20.588 ; J1.6@38.419,20.284 ccw(c38.31,19.094) 37.465,19.939 ; J1.6@38.481,20.955 37.465,19.939
PA2: J1.7 U1.12 | length 12.7
  Top Layer w0.152: U1.12@32.049,16.134 33.274,17.359 33.274,18.288 J1.7@35.941,20.955 ; U1.12@32.42,16.604 ccw(c32.42,16.842) 32.589,16.674 ccw(c32.757,16.505) U1.12@32.519,16.505 ; J1.7@35.267,20.955 cw(c33.641,20.955) 34.791,19.805 cw(c35.941,18.655) J1.7@35.941,20.281 ; J1.7@35.42,20.955 cw(c34.161,20.955) 35.051,20.065 cw(c35.941,19.175) J1.7@35.941,20.434 ; J1.7@35.572,20.955 cw(c34.681,20.955) 35.311,20.325 cw(c35.941,19.695) J1.7@35.941,20.586
PA3: J1.8 U1.13 | length 13.9
  Top Layer w0.152: U1.13@29.457,16.505 ccw(c29.219,16.505) 29.387,16.674 ccw(c29.556,16.842) U1.13@29.556,16.604 ; U1.13@29.927,16.134 29.21,16.851 29.21,18.034 30.353,19.177 31.623,19.177 J1.8@33.401,20.955 ; J1.8@32.727,20.955 cw(c31.101,20.955) 32.251,19.805 cw(c33.401,18.655) J1.8@33.401,20.281 ; J1.8@32.88,20.955 cw(c31.621,20.955) 32.511,20.065 cw(c33.401,19.175) J1.8@33.401,20.434 ; J1.8@33.032,20.955 cw(c32.141,20.955) 32.771,20.325 cw(c33.401,19.695) J1.8@33.401,20.586
PA4: J1.9 U1.14 | length 12.3
  Top Layer w0.152: U1.14@29.104,16.151 ccw(c28.865,16.151) 29.034,16.32 ccw(c29.203,16.489) U1.14@29.203,16.25 ; U1.14@29.574,15.78 28.702,16.652 28.702,18.669 30.861,20.828 J1.9@30.861,20.955 ; 29.621,19.588 ccw(c28.254,20.955) J1.9@30.187,20.955 ; 29.881,19.848 ccw(c28.774,20.955) J1.9@30.34,20.955 ; 29.928,19.895 cw(c30.861,18.961) J1.9@30.861,20.281 ; 30.141,20.108 ccw(c29.295,20.955) J1.9@30.492,20.955 ; 30.188,20.155 cw(c30.861,19.481) J1.9@30.861,20.434
PA5: J1.10 U1.15 | length 12.5
  Top Layer w0.152: J1.10@27.845,20.479 cw(c26.694,19.328) 28.321,19.328 cw(c29.948,19.328) J1.10@28.797,20.479 ; J1.10@27.952,20.586 cw(c27.062,19.696) 28.321,19.696 cw(c29.58,19.696) J1.10@28.69,20.586 ; J1.10@28.06,20.694 cw(c27.43,20.064) 28.321,20.064 cw(c29.212,20.064) J1.10@28.582,20.694 ; J1.10@28.321,20.955 28.321,19.05 27.94,18.669 27.94,16.707 U1.15@29.22,15.427 ; U1.15@28.75,15.798 ccw(c28.512,15.798) 28.68,15.967 ccw(c28.849,16.135) U1.15@28.849,15.897
PA6: J1.11 U1.16 | length 13.5
  Top Layer w0.152: J1.11@25.305,20.479 cw(c24.154,19.328) 25.781,19.328 cw(c27.408,19.328) J1.11@26.257,20.479 ; J1.11@25.412,20.586 cw(c24.522,19.696) 25.781,19.696 cw(c27.04,19.696) J1.11@26.15,20.586 ; J1.11@25.52,20.694 cw(c24.89,20.064) 25.781,20.064 cw(c26.672,20.064) J1.11@26.042,20.694 ; J1.11@25.781,20.955 25.781,19.303 27.304,17.78 27.304,16.636 U1.16@28.867,15.073 ; U1.16@28.397,15.444 ccw(c28.158,15.444) 28.327,15.613 ccw(c28.495,15.782) U1.16@28.495,15.543
PA7: J1.12 U1.17 | length 14.7
  Top Layer w0.152: J1.12@23.241,20.281 cw(c23.241,18.655) 24.391,19.805 cw(c25.541,20.955) J1.12@23.915,20.955 ; J1.12@23.241,20.434 cw(c23.241,19.175) 24.131,20.065 cw(c25.021,20.955) J1.12@23.762,20.955 ; J1.12@23.241,20.586 cw(c23.241,19.695) 23.871,20.325 cw(c24.501,20.955) J1.12@23.61,20.955 ; J1.12@23.241,20.955 26.696,17.5 26.696,16.536 U1.17@28.513,14.72 ; U1.17@28.043,15.091 ccw(c27.805,15.091) 27.973,15.259 ccw(c28.142,15.428) U1.17@28.142,15.19
PA8: J2.16 U1.29 | length 27.4
  Top Layer w0.152: U1.29@27.452,8.709 v1(28.338,9.595) ; U1.29@27.824,9.179 ccw(c27.824,9.418) 27.992,9.249 ccw(c28.161,9.08) U1.29@27.923,9.08 ; v1@28.16,9.595 cw(c27.731,9.595) 28.035,9.291 cw(c28.338,8.988) v1@28.338,9.417
  Bottom Layer w0.152: J2.16@13.081,1.778 17.145,5.842 24.585,5.842 v1(28.338,9.595) ; J2.16@13.081,2.147 ccw(c13.081,3.038) 13.711,2.408 ccw(c14.341,1.778) J2.16@13.45,1.778 ; J2.16@13.081,2.299 ccw(c13.081,3.558) 13.971,2.668 ccw(c14.861,1.778) J2.16@13.602,1.778 ; J2.16@13.081,2.452 ccw(c13.081,4.078) 14.231,2.928 ccw(c15.381,1.778) J2.16@13.755,1.778 ; v1@28.16,9.595 cw(c27.731,9.595) 28.035,9.291 cw(c28.338,8.988) v1@28.338,9.417
PA9: J2.15 U1.30 | length 22.6
  Top Layer w0.152: v1(26.92,7.47) U1.30@27.806,8.356 ; v1@26.92,7.648 ccw(c26.92,8.077) 27.224,7.773 ccw(c27.527,7.47) v1@27.098,7.47 ; U1.30@27.336,7.984 cw(c27.097,7.984) 27.266,7.816 cw(c27.435,7.647) U1.30@27.435,7.886
  Bottom Layer w0.152: J2.15@15.621,1.778 19.05,5.207 24.657,5.207 v1(26.92,7.47) ; J2.15@15.621,2.147 ccw(c15.621,3.038) 16.251,2.408 ccw(c16.881,1.778) J2.15@15.99,1.778 ; J2.15@15.621,2.299 ccw(c15.621,3.558) 16.511,2.668 ccw(c17.401,1.778) J2.15@16.142,1.778 ; J2.15@15.621,2.452 ccw(c15.621,4.078) 16.771,2.928 ccw(c17.921,1.778) J2.15@16.295,1.778 ; v1@26.742,7.47 cw(c26.313,7.47) 26.617,7.166 cw(c26.92,6.863) v1@26.92,7.292
PA10: J2.14 U1.31 | length 22.7
  Top Layer w0.152: U1.31@28.16,8.002 v1(29.045,8.888) ; U1.31@28.531,8.472 ccw(c28.531,8.711) 28.699,8.542 ccw(c28.868,8.373) U1.31@28.63,8.373 ; v1@28.868,8.888 cw(c28.438,8.888) 28.742,8.584 cw(c29.045,8.281) v1@29.045,8.71
  Bottom Layer w0.152: J2.14@18.161,1.778 21.082,4.699 24.857,4.699 v1(29.045,8.888) ; J2.14@18.161,2.147 ccw(c18.161,3.038) 18.791,2.408 ccw(c19.421,1.778) J2.14@18.53,1.778 ; J2.14@18.161,2.299 ccw(c18.161,3.558) 19.051,2.668 ccw(c19.941,1.778) J2.14@18.682,1.778 ; J2.14@18.161,2.452 ccw(c18.161,4.078) 19.311,2.928 ccw(c20.461,1.778) J2.14@18.835,1.778 ; v1@28.868,8.888 cw(c28.438,8.888) 28.742,8.584 cw(c29.045,8.281) v1@29.045,8.71